# Altium PCB Magnetic Sensor.PcbDoc
Units mil, origin at the board's own origin, x right, y up, seen from the top; angles counter-clockwise.
Board outline 1405 x 1905 mil, 2 copper layers (Top Layer, Bottom Layer); 28 components, 20 nets, 98 pads, 55 vias.
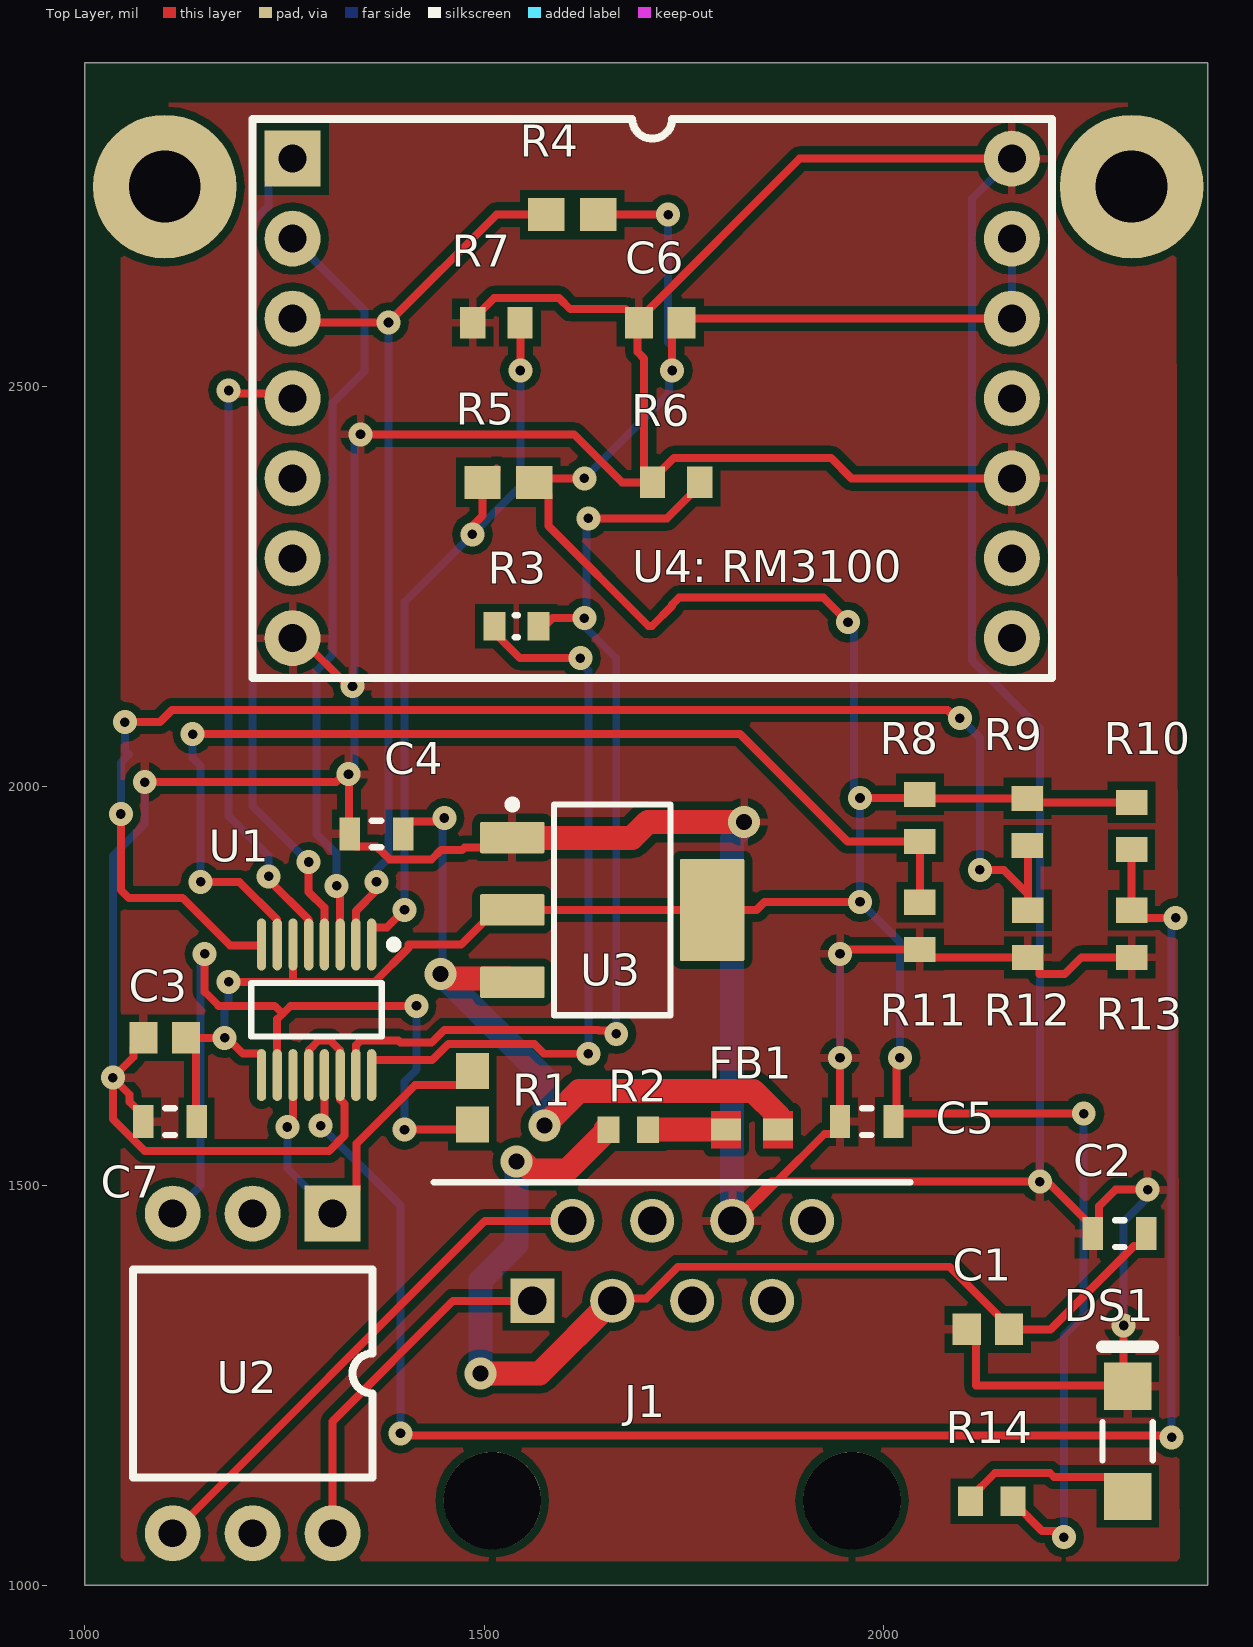
[diagram p0: Top Layer view]
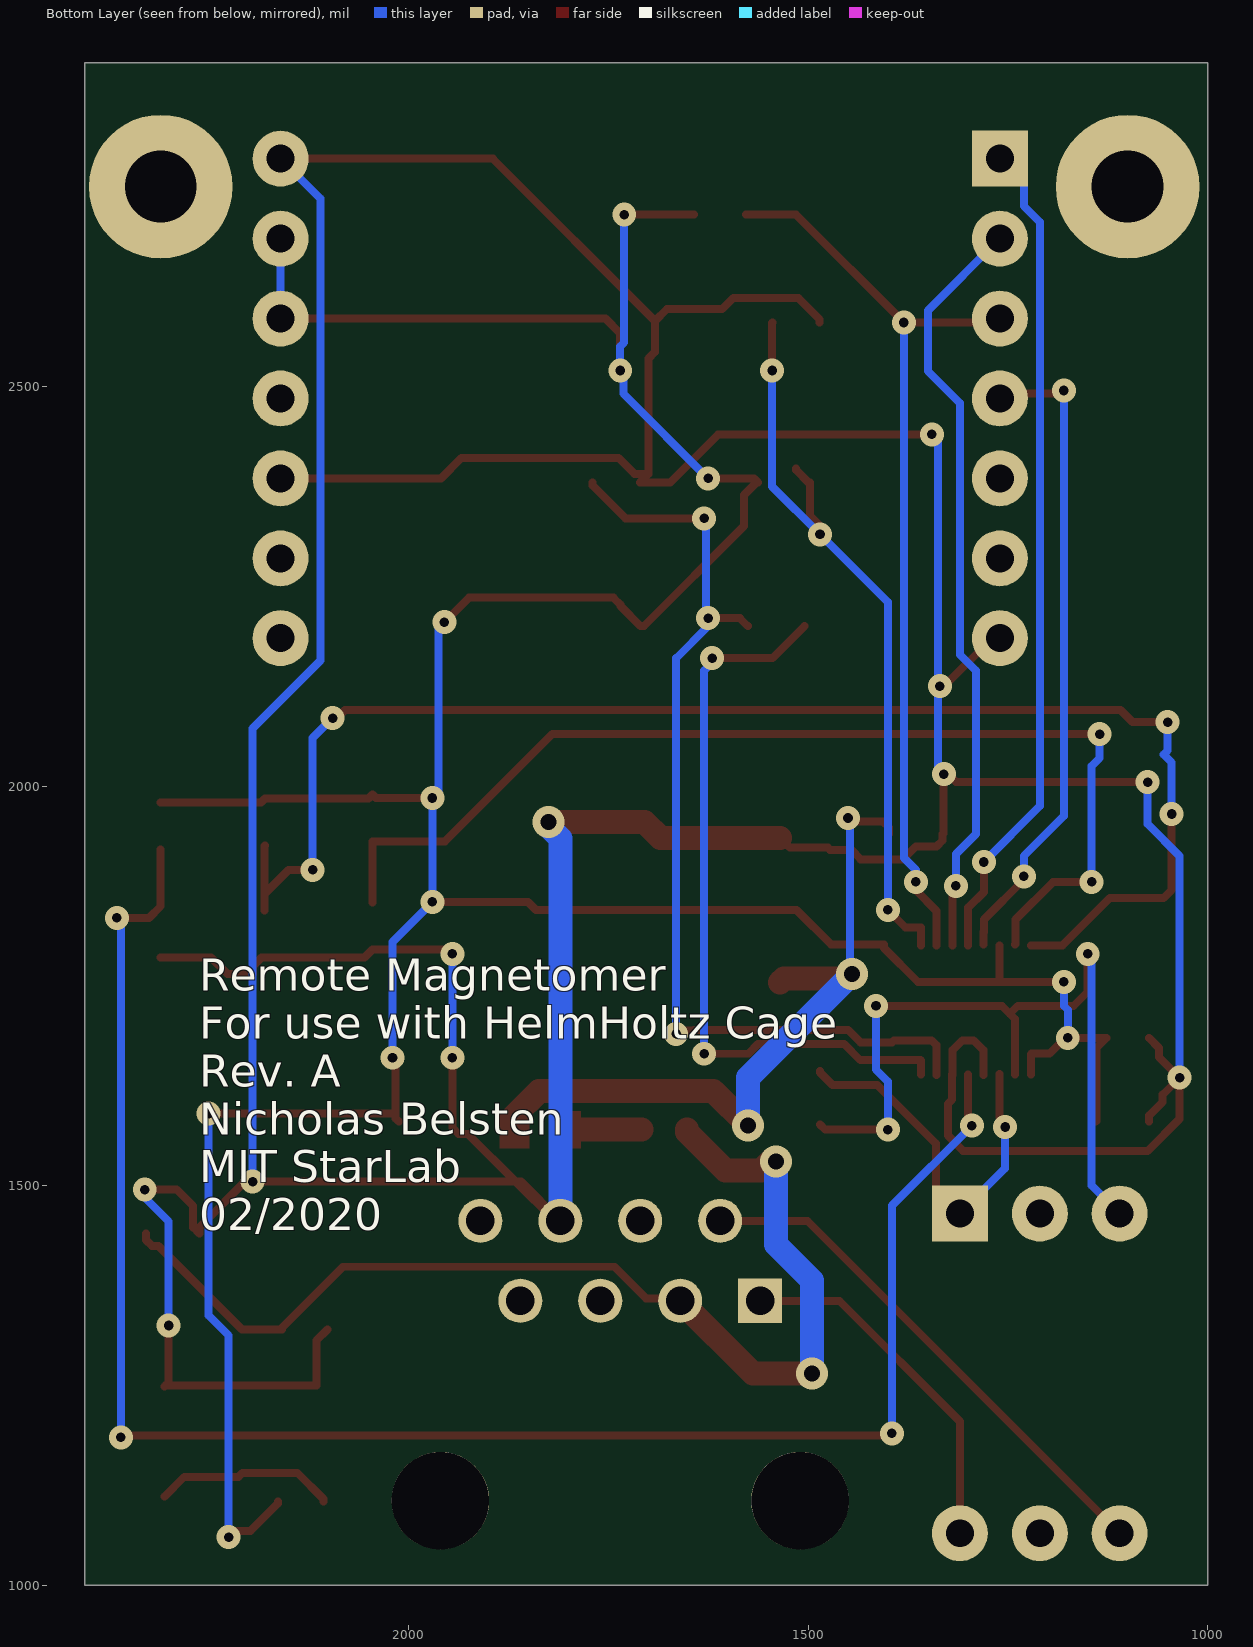
[diagram p1: Bottom Layer view, seen from below]

## Layer stack, top to bottom
Top Solder: solder mask 0.4, Solder Resist, Dk 3.5
Top Layer: signal copper 1.4
Dielectric 1: dielectric 12.6, FR-4, Dk 4.8
Bottom Layer: signal copper 1.4
Bottom Solder: solder mask 0.4, Solder Resist, Dk 3.5

## Board outline
1000,1000 2405,1000 2405,2905 1000,2905

## Design rules (kind name [scope] priority, off if disabled: settings)
Clearance [All] p1: gap=10 ignorepadtopadclearanceinfootprint=TRUE except(0: Arc-Hole Track-Hole SMDPad-Hole THPad-Hole Via-Hole Fill-Hole Poly-Hole Region-Hole Text-Hole; 6: Arc-Arc Arc-Track Arc-SMDPad Track-Track Track-SMDPad SMDPad-SMDPad SMDPad-THPad SMDPad-Via)
HoleSize [All] p1: absolutevalues=TRUE maxlimit=260 minlimit=10 maxpercent=80.000 minpercent=20.000
MinimumSolderMaskSliver [All] p1: minsoldermaskwidth=3.5
PolygonConnect [All] p1: connectstyle=Relief reliefconductorwidth=10 reliefentries=4 polygonreliefangle="90 Angle" airgapwidth=10
RoomDefinition "Magnetic Sensor" [InComponentClass('Magnetic Sensor')] p1: confinementstyle=ConfineIn formatcopy=TRUE lockcomponents=FALSE outline 925,710 2530,710 2530,2970 925,2970
RoutingVias [All] p1: holewidth=12 width=30 viastyle="Through Hole" minholewidth=10 minwidth=20 maxholewidth=28 maxwidth=50
SilkToSilkClearance [All] p1: silktosilkclearance=0
SilkToSolderMaskClearance [IsPad] p1: minsilkscreentomaskgap=3.5 clearancetoexposedcopper=TRUE
SolderMaskExpansion [All] p1: expansion=4
Width [All] p1: maxlimit=30 minlimit=6 preferedwidth=10 minimp=50.000000 maximp=50.000000 favimp=50.000000
26 further rules are at their usual default settings.

## Components (designator, comment, footprint, x,y, rotation, side; value= is the part's Value field where it differs from the comment)
C1 "0.1 uF" CAPC1608X87X35NL15T15 2130,1320 r0 top
C2 "10 uF" CAPC1608X90X20ML10 2295,1440 r0 top
C3 "0.1 uF" CAPC1608X87X35NL15T15 1100,1685 r0 top
C4 "10 uF" CAPC1608X90X20ML10 1365,1940 r0 top
C5 "10 uF" CAPC1608X90X20ML10 1978.46,1580 r0 top
C6 "0.1 uF" CAPC1608X87X35NL15T15 1720,2580 r0 top
C7 "10 uF" CAPC1608X90X20ML10 1106.54,1580 r0 top
DS1 "HSMH-C150" AVAG-HSMX-C150_V 2305,1180 r90 top
FB1 "BLM18SG221TN1D" MURA-BLM18SG-B25-CHIP-2_V1 1835,1570 r0 top
J1 "615008137121" 615008137121 1735,1150 r0 top
R1 "120" RESC1609X55X30ML15T15 1485,1610 r90 top
R2 "0.18" RESC1608X55X30LL15T15 1680,1570 r0 top
R3 "2.8 k" RESC0603(1608)_L 1540,2200 r0 top value="2800.00 Ohm"
R4 "1 k" RESC1609X55X30ML10T20 1610,2715 r0 top
R5 "1 k" RESC1609X55X30ML10T20 1530,2380 r0 top
R6 "1.2 k" RESC1608X55X25ML10T15 1740,2380 r0 top
R7 "DNP" RESC1608X55X25ML10T15 1515,2580 r0 top
R8 "DNP" RESC1608X55X25ML10T15 2045,1960 r90 top
R9 "DNP" RESC1608X55X25ML10T15 2179.53,1955 r90 top
R10 "DNP" RESC1608X55X25ML10T15 2310,1950 r90 top
R11 "0 OHM" RESC1608X55X25ML10T15 2045,1825 r90 top
R12 "0 OHM" RESC1608X55X25ML10T15 2180,1815 r90 top
R13 "0 OHM" RESC1608X55X25ML10T15 2310,1815 r90 top
R14 "150" RESC1608X55X30NL15T15 2135,1105 r0 top
U1 "LTC6820IMS#TRPBF" LT-MS-16_N 1290,1720 r270 top
U2 "78613/3C" DIP6-400 1310,1465 r270 top
U3 "REG1117-3.3/2K5" DCY0004A_M 1660,1845 r0 top
"U4: RM3100" "RM3100" DIP14-900 1260,2785 r0 top (schematic designator U4)

## Footprints (in the part's own frame and the unit in brackets; to place one, negate y for a bottom-side part, rotate by r counter-clockwise, add the part's x,y. Pads: shape width x height; smd on the part's side, far side on the other; paste and mask are expansions set on the pad)
615008137121 [mm] "Modular Jack THT Horizontal Plastic 8P8C Tab Down"
  rect 1.4x1.4 hole 0.9: 1(-4.445,5.23)
  round 1.4 hole 0.9: 2(-3.175,7.77) 3(-1.905,5.23) 4(-0.635,7.77) 5(0.635,5.23) 6(1.905,7.77) 7(3.175,5.23) 8(4.445,7.77)
  round 3.1 hole 3.1 unplated: MH1(-5.715,-1.12) MH2(5.715,-1.12)
  silkscreen extent -7.57,9 7.57,9, body extent -7.57,-9 7.57,9, height 11.75
AVAG-HSMX-C150_V [mm] "SMD, 2-Leads, Body 3.2x1.6mm"
  rect 1.5x1.5 smd: 1(-1.75,0) 2(1.75,0)
  silkscreen extent -0.6,-0.8 3,0.8, body extent -1.6,-0.8 1.6,0.8, height 1.1
CAPC1608X87X35NL15T15 [mm] "Chip Capacitor, 2-Leads, Body 1.60x0.80mm, IPC Medium Density"
  rect 0.9x1 smd: 1(-0.675,0) 2(0.675,0)
  body extent -0.87,-0.48 0.87,0.47, height 0.87
CAPC1608X90X20ML10 [mm] "Chip Capacitor, 2-Leads, Body 1.70x0.90mm, IPC Low Density"
  rect 0.65x1.05 smd: 1(-0.85,0) 2(0.85,0)
  silkscreen extent -0.15,-0.43 0.15,0.43, body extent -0.85,-0.45 0.85,0.45, height 0.9
DCY0004A_M [mm] "SOT223, 4-Leads, Body 6.7x3.7mm, Pitch 2.3mm, IPC Low Density"
  rrect10% 2.05x1 smd: 1(-3.175,2.3) 2(-3.175,0) 3(-3.175,-2.3)
  rrect5% 2.05x3.25 smd: 4(3.175,0)
  silkscreen extent -3.3,-3.35 1.85,3.47, body extent -3.5,-3.25 3.5,3.25, height 1.62
DIP6-400 [mil]
  rect 70x70 hole 35: 1(0,0)
  round 70 hole 35: 2(0,-100) 3(0,-200) 4(400,-200) 5(400,-100) 6(400,0)
  silkscreen extent 70,-250 330,50, body extent 10,-290 745,65, height 250
DIP14-900 [mil]
  rect 70x70 hole 35: 1(0,0)
  round 70 hole 35: 2(0,-100) 3(0,-200) 4(0,-300) 5(0,-400) 6(0,-500) 7(0,-600) 8(900,-600) 9(900,-500) 10(900,-400) 11(900,-300) 12(900,-200) 13(900,-100) 14(900,0)
  silkscreen extent -50,-650 950,50
LT-MS-16_N [mm] "SOP, 16-Leads, Body 4.04x3.00mm, Pitch 0.50mm, IPC Medium Density"
  oval 1.65x0.3 smd: 1(-2.075,1.75) 2(-2.075,1.25) 3(-2.075,0.75) 4(-2.075,0.25) 5(-2.075,-0.25) 6(-2.075,-0.75) 7(-2.075,-1.25) 8(-2.075,-1.75) 9(2.075,-1.75) 10(2.075,-1.25) 11(2.075,-0.75) 12(2.075,-0.25) 13(2.075,0.25) 14(2.075,0.75) 15(2.075,1.25) 16(2.075,1.75)
  silkscreen extent -2.2,-2.08 0.85,2.58, body extent -1.55,-2.05 1.55,2.05, height 1.1
MURA-BLM18SG-B25-CHIP-2_V1 [mm] "Chip Ferrite Bead, 2-Leads, Body 1.6x0.8mm, Height 0.65mm, Flow, 18um Land Pad Thickness, 1.7 to 2.5A Rated Current"
  rect 0.95x0.7 smd mask+0: 1(-0.825,0) 2(0.825,0)
  Top Layer region: -1.3,-0.6 -0.35,-0.6 -0.35,0.6 -1.3,0.6
  Top Layer region: 0.35,-0.6 1.3,-0.6 1.3,0.6 0.35,0.6
  body extent -0.8,-0.4 0.8,0.4, height 0.65
RESC0603(1608)_L [mm] "Chip Resistor, Body 1.6x0.8mm, IPC High Density"
  rect 0.7x0.9 smd: 1(-0.7,0) 2(0.7,0)
  silkscreen extent -0.05,-0.35 0.05,0.35, body extent -0.85,-0.47 0.85,0.47, height 0.6
RESC1608X55X25ML10T15 [mm] "Chip Resistor, 2-Leads, Body 1.60x0.80mm, IPC Low Density"
  rect 0.8x1 smd: 1(-0.75,0) 2(0.75,0)
  body extent -0.85,-0.45 0.85,0.45, height 0.55
RESC1608X55X30LL15T15 [mm] "Chip Resistor, 2-Leads, Body 1.60x0.80mm, IPC High Density"
  rect 0.7x0.85 smd: 1(-0.625,0) 2(0.625,0)
  body extent -0.87,-0.48 0.87,0.48, height 0.55
RESC1608X55X30NL15T15 [mm] "Chip Resistor, 2-Leads, Body 1.60x0.80mm, IPC Medium Density"
  rect 0.8x0.95 smd: 1(-0.675,0) 2(0.675,0)
  body extent -0.87,-0.48 0.87,0.48, height 0.55
RESC1609X55X30ML10T20 [mm] "Chip Resistor, 2-Leads, Body 1.60x0.85mm, IPC Low Density"
  rect 1.15x1.05 smd: 1(-0.825,0) 2(0.825,0)
  body extent -0.85,-0.48 0.85,0.48, height 0.55
RESC1609X55X30ML15T15 [mm] "Chip Resistor, 2-Leads, Body 1.75x0.95mm, IPC Low Density"
  rect 1.15x1.05 smd: 1(-0.85,0) 2(0.85,0)
  body extent -0.87,-0.48 0.87,0.48, height 0.55

## Part data
C1 C3 C6: library part CMP-2006-03300-1, Manufacturer=Kemet, Part Number=C0603X104K5RACTU
C2 C4 C5 C7: library part CMP-2000-04979-1, "Chip Capacitor, 10 uF, +/- 10%, 10 V, -55 to 85 degC, 0603 (1608 Metric), RoHS, Tape and Reel", Capacitance=10礔, Manufacturer=TDK, Operating Temperature=-55degC~85degC, Package / Case=0603(1608Metric), Package Description="2-Pin Surface Mount Device, Body 1.6 x 0.8 mm", Package Reference=603, PCN Part Number=MLCCPartNumberChange30/Nov/2012, Ratings=-, Standard Package=1, Temperature Coefficient=X5R, Tolerance=±10%, Voltage - Rated=10V, Applications=GeneralPurpose, Category=Capacitors, Datasheet URL=http://download.siliconexpert.com/pdfs/2015/4/21/15/54/45/779/tdk_/manual/37024850441143360mlcc_commercial_general_en.pdf, Datasheet Version=Mar-15, Design Resources=20WNon-IsolatedBuckLEDDriverUsingPLLNK460KG, Family=CeramicCapacitors, Features=-, Height - Seated (Max)=-, Kits=445-9003-KIT-ND-KITCAPCERHICAPMLCCSMD, Lead Spacing=-, Lead Style=-, Manufacturer URL=http://www.tdk.com/, Mounting Type=SurfaceMount,MLCC, Online Catalog=CSeries,GeneralPurpose, Other Names=445-7486-1, Packaging=CutTape(CT)牋, Product Training Modules=CSeriesGeneralApplicationsSEAT,CCV,andTVCLDesignToolsGuidetoReplacinganElectrolyticCapacitorwithanMLCC, RoHS Information=RoHSCertificate-MLCC, Series=C, Size / Dimension="0.063\"Lx0.031\"W(1.60mmx0.80mm)", Thickness (Max)="0.035\"(0.90mm)"
DS1: library part CMP-2000-06426-1, "LED Uni-Color Red, 65 mW, 25 mA, -40 to 85 degC, 2-Pin SMD, RoHS, Tape and Reel", Emitting Color=Red, Forward Current=25mA, Forward Voltage=2.6V, Manufacturer=Avago, Operating Temperature Classification=Industrial, Operating Temp Range=-40Cto85C, Package Description="2-Pin Surface Mount Device, Body 3.2 x 1.6 mm", Package Reference=HSMX-C150, Package Type=ChipLed, Power Dissipation=78W, Reverse Voltage=5V, Test Current (It)=20mA, Chip Material=GaAlAs, Datasheet URL=http://media.digikey.com/pdf/Data%20Sheets/Avago%20PDFs/HSMz-Czzz.pdf, Datasheet Version=03/2012, DELETED=Compliant, Dominant Wave Length=639nm, High Brightness=No, Lens Dimensions=2x1.6x0.6mm, Lens Type=ColorlessDiffused, Luminous Intensity=17mcd, Lum Intensity=17mcd, Main Category=ChipLED, Manufacturer URL=http://www.avagotech.com/, Mounting=SurfaceMount, Mounting Technology=SurfaceMount, Number of  Elements=1, Packaging=TapeandReel, Peak Wavelength=660nm, Pin Count=2, Product Depth (mm)=1.6mm, Product Height (mm)=1.1mm, Product Length (mm)=3.2mm, Rad Hardened=No, Shape Type=Rectangular, Type=Uni-Color, Viewing Angle=170deg
FB1: library part CMP-0686-00596-2, "Chip Ferrite Bead for Power Lines (Low DC Resistance Type), 220 Ohm, 2500 mA, -55 to 125 degC, 1.6 x 0.8 x 0.65 mm SMD, Tape and Reel", DC Resistance="0.040 Ohm Max.", Manufacturer=Murata, Operating Temperature Range="-55 to 125 degC", Rated Current="2500 mA", ComponentLink1Description="Manufacturer URL", ComponentLink1URL=http://www.murata.com/, ComponentLink2Description=Datasheet, ComponentLink2URL=http://www.murata.com/products/catalog/pdf/c31e.pdf, ComponentLink3Description="Package Specification", ComponentLink3URL=http://www.murata.com/products/catalog/pdf/c31e.pdf, DatasheetVersion=08/2013, Impedance (at 100 MHz)="220 Ohm +/- 25%", Mounting Technology="Surface Mount", PackageDescription="2-Pin Chip, Body 1.6 x 0.8 mm", PackageReference=BLM18_H650-2, Packing="Tape and Reel", PartNumber=BLM18SG221TN1D
J1: library part CMP-1502-01679-1, "Modular Jack WR-MJ, Tab Down, Plastic, Horizontal Entry, THT, 8P8C", Contact Resistance=20mOhm, Manufacturer="Wurth Elektronik", Operating Temperature=-40to85degC, Rated Current=1.5A, Withstanding Voltage=1000VAC, Working Voltage=120VAC, Compliance=Leadfree/RoHS, Datasheet URL=https://katalog.we-online.com/em/datasheet/615008137121.pdf, Entrance=Horizontal, Manufacturer URL=http://www.we-online.de, Mounting Technology=THT, Package Reference=615008137121, Packaging=Tray, Part Number=615008137121, Pin Number=8P8C, Port=1x1, Publisher=WurthElektronik
R1: library part CMP-2100-03629-1, "Chip Resistor, 120 Ohm, +/- 1%, 0.1 W, -55 to 155 degC, 0603 (1608 Metric), RoHS, Tape and Reel", Case/Package=0603, Case Code (Metric)=1608, Manufacturer=Panasonic, Max Operating Temperature=155degC, Max Power Dissipation=100mW, Min Operating Temperature=-55degC, Package Description="2-Pin Surface Mount Device, Body 1.6 x 0.85 mm", Package Quantity=1, Resistance=120Ohm, Temperature Coefficient=100ppm/degreesC, Tolerance=1%, Voltage Rating=75V, Case Code (Imperial)=0603, Composition=ThickFilm, Contact Plating=Tin, Datasheet URL=https://industrial.panasonic.com/cdbs/www-data/pdf/RDA0000/AOA0000C283.pdf, Datasheet Version=42095.0, Depth=0.8mm, Height=0.022inch, Lead Free=LeadFree, Length=1.6mm, Manufacturer URL=http://www.panasonic.com/, Military Standard=Not, Mount=SurfaceMount, Number of Pins=2, Number of Terminations=2, Package Reference=0603, Package URL=http://www.st.com/st-web-ui/static/active/en/resource/technical/document/datasheet/CD00001320.pdf, Packaging=TapeandReel, Power Rating=100mW, Radiation Hardening=No, REACH SVHC=NoSVHC, RoHSCompliant=true, Termination=SMD/SMT, Voltage Rating (DC)=75V, Width=0.031inch
R2: library part CMP-2000-00865-1, Manufacturer=Panasonic, Part Number=ERJ-3RSFR18V
R3: library part CMP-1012-00559-1, "2K8 0.1W 1% 0603 (1608 Metric)  SMD", Case-EIA=0603, Case-Metric=1608, Power="0.1 W", Tolerance="1 %", Technology=SMT
R4 R5: library part CMP-2000-02970-1, Manufacturer="Vishay Dale", Part Number=CRCW06031K00FKEAHP
R6: library part CMP-2000-04824-1, Manufacturer=Yageo, Part Number=AC0603FR-071K2L
R7 R8 R9 R10 R11 R12 R13: library part CMP-2100-03667-1, "Chip Resistor, 0 Ohm, +/- 5%, 0.1 W, -55 to 155 degC, 0603 (1608 Metric), RoHS, Tape and Reel", Case/Package=0603, Case Code (Metric)=1608, Manufacturer=Yageo, Max Operating Temperature=155degC, Min Operating Temperature=-55degC, Package Description="2-Pin Surface Mount Device, Body 1.6 x 0.8 mm", Package Quantity=5000, Power Rating=100mW, Resistance=0mOhm, Temperature Coefficient=200ppm/degreesC, Tolerance=5%, Voltage Rating=50V, Case Code (Imperial)=0603, Composition=ThickFilm, Contact Plating=Tin, Datasheet URL=http://www.yageo.com/NewPortal/yageodocoutput?fileName=/pdf/R-Chip/PYu-RC_Group_51_RoHS_L_5.pdf, Datasheet Version="Rev. 5, 10/2016", Depth=0.8mm, Height=0.45mm, Lead Free=LeadFree, Length=1.6mm, Manufacturer URL=http://www.yageo.com/, Military Standard=Not, Number of Pins=2, Package Reference=0603, Packaging=TapeandReel, Radiation Hardening=No, REACH SVHC=NoSVHC, RoHSCompliant=true, Termination=SMD/SMT, Voltage Rating (DC)=50V, Width=0.8mm
R14: library part CMP-2000-00256-1, Manufacturer=Panasonic, Part Number=ERJ-3EKF1500V
U1: library part CMP-0937-00011-1, "IsoSPI Isolated Communication Interface, 2.7 to 5.5 V, -40 to 85 degC, 16-Pin MSOP (MS), Pb-Free, Tape and Reel", IO Supply Current="1 uA Max.", IO Supply Voltage Range="1.7 to 5.5 V", Manufacturer="Linear Technology", Power Supply="2.7 to 5.5 V", Receiver Input Resistance="35 kOhm", Supply Current, IDLE State="2 uA", Temperature Range (degC)="-40 to 85", ComponentLink1Description="Manufacturer URL", ComponentLink1URL=http://www.linear.com/, ComponentLink2Description=Datasheet, ComponentLink2URL=http://cds.linear.com/docs/en/datasheet/6820fa.pdf, ComponentLink3Description="Package Specification", ComponentLink3URL=http://cds.linear.com/docs/en/packaging/05081669_A_MS16.pdf, DatasheetVersion="Rev. A", Mounting Technology="Surface Mount", PackageDescription="16-Pin Micro Small Outline Package, Body 4.039 x 3 mm, Pitch 0.5 mm", PackageReference=MS-16, PackageVersion="Rev. A", Packing="Tape and Reel", PartNumber=LTC6820IMS#TRPBF, VBIAS="1.9 to 2.1 V"
U3: library part CMP-0395-00546-2, "Single Output LDO, 800 mA, Fixed 3.3 V Output, 3.8 to 15 V Input, with Internal Current Limiting, 4-pin SOT-223 (DCY), -40 to 125 degC, Green (RoHS & no Sb/Br)", Manufacturer="Texas Instruments", Rating=Catalog, Code_JEDEC=TO-261, ComponentLink1Description="Manufacturer URL", ComponentLink1URL=http://www.ti.com/, ComponentLink2Description=Datasheet, ComponentLink2URL=http://www.ti.com/general/docs/lit/getliterature.tsp?genericPartNumber=REG1117-33&fileType=pdf, ComponentLink3Description="Package Specification", ComponentLink3URL=http://www.ti.com/litv/pdf/mpds094a, DatasheetVersion=SBVS001D, Eco-Plan="Green (RoHS & no Sb/Br)", Fixed Output Options(V)=5, Iout(Max)(A)=0.8, Iq(Typ)(mA)=4, Mounting Technology="Surface Mount", PackageDescription="4-Pin Plastic Small Outline, Body 3.5 x 6.5 mm, Pitch 2.3 mm", PackageReference=DCY0004A, PackageVersion=4202506/B, PartNumber=REG1117-3.3/2K5, SubFamily="Single Channel LDO", Vdo(Typ)(mV)=1100, Vin(Max)(V)=15, Vin(Min)(V)=3.8, Vout Adj(Max)(V)=3.3, Vout Adj(Min)(V)=3.3

## Free pads (board coordinates)
  round 180 hole 90: 1(1100,2750) 2(2310,2750)

## Via types
v1: diameter 30, hole 12, Top Layer to Bottom Layer, 50 vias
v2: diameter 40, hole 20, Top Layer to Bottom Layer, 5 vias

## Nets (pads, with @x,y where several pads share a name; then routed paths per layer and width w, separated by ;. In a path a pad name is that pad's centre, name@x,y a point inside that pad or via, vN(x,y) a via of type N, cw(c..) or ccw(c..) an arc to the next point about the centre after c; other vN are vias at no path point)
3V3: "U4: RM3100.12" "U4: RM3100.13" C3.2 C5.2 C6.2 C7.2 R4.2 R5.2 R8.2 R9.2 R10.2 R14.2 U1.6 U1.9 U3.2 U3.4 | length 4676.8
  Top Layer w10: C7.2 1139.29,1580.71 1139.29,1672.28 C3.2 v1(1175,1685) 1177.86,1685 1197.64,1665.22 1220.27,1665.22 1221.1,1664.38 U1.9@1221.1,1639.29 ; v1(1180,1755) 1260,1755 ; U1.6@1260.47,1800.71 1260.39,1800.63 1260.39,1755.39 1260,1755 ; v1(1625,2385) 1567.48,2385 R5.2 1564.45,2380 1580.12,2364.33 1580.12,2325.43 1705.55,2200 1709.49,2200 1734.84,2225.35 1734.84,2226.88 1743.63,2235.67 1924.33,2235.67 v1(1955,2205) ; R4.2 v1(1730,2715) ; v1(1735,2520) 1735,2566.46 1753.54,2585 2160,2585 ; v1(1970,1855) 1850.35,1855 1840.35,1845 U3.4 U3.2 1514.33,1845 1470.99,1801.66 1405,1801.66 1405,1797.31 1362.69,1755 1260,1755 ; v1(1970,1985) 2040.47,1985 R8.2 2050,1984.53 R9.2 2184.53,1979.53 R10.2 ; C5.2 2015.96,1584.04 C5.2@2015.96,1586.24 ; v1(2020,1660) 2015.96,1655.96 C5.2@2015.96,1586.24 ; R14.2@2163.54,1105 2163.54,1102.05 2197.94,1067.65 2217.35,1067.65 v1(2225,1060) ; v1(2250,1590) 2019.72,1590 C5.2@2015.96,1586.24
  Bottom Layer w10: v1(1175,1685) 1175,1720 1180,1725 v1(1180,1755) ; v1(1625,2385) 1731.17,2491.17 1731.17,2516.17 v1(1735,2520) 1735,2550 1730,2555 v1(1730,2715) ; v1(1955,2205) 1962.5,2197.5 1962.5,1992.5 v1(1970,1985) v1(1970,1855) 2020,1805 v1(2020,1660) ; 2160,2585 2160,2685 ; v1(2225,1060) 2225,1312.5 2250,1337.5 v1(2250,1590)
5V: C4.2 FB1.2 U3.3 | length 940.7
  Top Layer w10: C4.2 1398.46,1947.87 1406.26,1955.67 1445.67,1955.67 v1(1450,1960)
  Top Layer w30: v2(1445,1765) 1450.41,1765 1456.28,1759.13 1530.31,1759.13 U3.3 ; v2(1575,1575) 1618.62,1618.62 1836.38,1618.62 1867.48,1587.52 FB1.2
  Bottom Layer w10: v2(1445,1765) 1447.5,1767.5 1447.5,1957.5 v1(1450,1960)
  Bottom Layer w30: v2(1445,1765) 1575,1635 v2(1575,1575)
CS_L: "U4: RM3100.4" U1.5 | length 818.9
  Top Layer w10: v1(1180,2495) 1183.83,2491.17 1253.83,2491.17 1260,2485 ; v1(1230,1886.99) 1230,1882.65 1279.81,1832.84 1279.81,1817.44 1280.16,1817.09 U1.5
  Bottom Layer w10: v1(1180,2495) 1180,1962.57 1230,1912.57 v1(1230,1886.99)
GND: "U4: RM3100.7" "U4: RM3100.10" "U4: RM3100.14" C1.1 C2.1 C3.1 C4.1 C5.1 C6.1 C7.1 DS1.2 J1.6 R6.1 R7.1 R11.1 R12.1 R13.1 U1.12 U1.14 U3.1 | length 8113.1
  Top Layer w10: C7.1 1073.07,1587.87 1056.21,1604.73 1056.21,1613.79 v1(1035,1635) ; C3.1 1060.71,1672.28 1060.71,1660.71 v1(1035,1635) ; v1(1075,2005) 1314.59,2005 1324.59,2015 v1(1330,2015) 1330.77,2014.23 1330.77,1940.77 C4.1 1331.54,1932.13 1339.33,1924.33 1365.11,1924.33 1374.67,1914.77 1381.11,1908.33 1434.11,1908.33 1445.78,1920 1472.28,1920 1475.11,1922.83 1522.83,1922.83 U3.1@1535.28,1935.28 ; 1260,2185 1269.59,2185 1329.59,2125 v1(1335,2125) ; U1.12 1280.5,1638.65 1280.5,1669.45 1292.84,1681.79 1306.84,1681.79 1319.18,1669.45 1319.18,1638.65 U1.14 ; U1.14@1319.53,1639.29 1319.61,1639.21 1319.61,1607.82 1325,1602.43 1325,1562.57 1305.82,1543.39 1075,1543.39 1035,1583.39 v1(1035,1635) ; v1(1345,2440) 1612.43,2440 1672.43,2380 R6.1 R6.1@1699.72,2390.75 ; R7.1 1485.47,2583.94 1512.22,2610.69 1593.48,2610.69 1607.51,2596.65 1676.77,2596.65 C6.1@1691.46,2581.97 ; v1(1945,1660) C5.1 1945,1572.13 1937.2,1564.33 1925.35,1564.33 1866.02,1505 ; v1(1945,1790) 1950.47,1795.47 R11.1 2055,1785.47 R12.1 2183.94,1785.47 2194.69,1774.72 2194.69,1764.72 2226.22,1764.72 2246.97,1785.47 R13.1 ; C1.1@2101.46,1320 2115,1306.46 2115,1250 DS1.2@2303.9,1250 ; 2160,2385 1959.34,2385 1933.65,2410.69 1737.22,2410.69 1717.28,2390.75 R6.1@1699.72,2390.75 ; 2160,2785 1894.49,2785 C6.1@1691.46,2581.97 ; v1(2300,1325) 2300,1253.9 DS1.2@2303.9,1250 ; DS1.2 DS1.2@2303.9,1250 ; v1(2330,1495) 2290,1495 2269.33,1474.33 2269.33,1447.8 C2.1 2261.54,1447.87 2204.41,1505 v1(2195,1505) 1866.02,1505 ; C6.1@1691.46,2581.97 1691.46,2543.35 1699.72,2535.08 R6.1@1699.72,2390.75 ; 1866.02,1505 1816.92,1455.91 J1.6 1859.09,1505 1866.02,1505
  Top Layer w30: U3.1@1535.28,1935.28 1684.72,1935.28 1704.45,1955 v2(1825,1955)
  Bottom Layer w10: v1(1035,1635) 1035,1912.57 1075,1952.57 v1(1075,2005) ; v1(1330,2015) 1337.5,2022.5 1337.5,2432.5 v1(1345,2440) ; v1(1945,1660) v1(1945,1790) ; 2160,2785 2110,2735 2110,2157.09 2195,2072.09 v1(2195,1505) ; v1(2300,1325) 2300,1455 2330,1485 v1(2330,1495)
  Bottom Layer w30: J1.6 1810,1934.59 1825,1949.59 v2(1825,1955)
IM0: J1.2 U2.4 | length 661.9
  Top Layer w10: U2.4 1500.91,1455.91 J1.2
IP0: J1.1 U2.6 | length 452.5
  Top Layer w10: U2.6 1310,1205 1460.91,1355.91 J1.1
NetC1_2: C1.2 C2.2 J1.3 R2.1 | length 1399.4
  Top Layer w10: J1.3 1662.75,1358.65 1702.56,1358.65 1742.37,1398.46 2082.05,1398.46 2158.54,1321.97 2158.54,1320 2208.46,1320 2312.8,1424.33 2320.67,1424.33 2328.46,1432.13 C2.2
  Top Layer w30: v2(1495,1265) 1569.09,1265 J1.3 ; v2(1540,1530) 1547.65,1530 1558.83,1518.83 1603.24,1518.83 1651.46,1567.05 R2.1@1651.46,1570
  Bottom Layer w30: v2(1495,1265) 1495,1381.38 1540,1426.38 v2(1540,1530)
NetDS1_1: DS1.1 R14.1 | length 227.3
  Top Layer w10: R14.1@2106.46,1105 2106.46,1107.95 2139.17,1140.67 2207.52,1140.67 2212.56,1135.63 2280.47,1135.63 DS1.1
NetFB1_1: FB1.1 R2.2 | length 94
  Top Layer w30: R2.2@1708.54,1570 FB1.1
NetR1_1: R1.1 U1.10 U2.3 | length 997
  Top Layer w10: v1(1150,1790) 1150,1742.57 1167.57,1725 1237.57,1725 1247.57,1715 ; U1.10@1240.79,1639.29 1240.79,1708.21 1247.57,1715 ; v1(1400,1570) 1478.46,1570 R1.1 ; v1(1415,1725) 1257.57,1725 1247.57,1715
  Bottom Layer w10: U2.3 1145,1500 1145,1785 v1(1150,1790) ; v1(1400,1570) 1400,1630 1415,1645 v1(1415,1725)
NetR1_2: R1.2 U1.11 U2.1 | length 489.3
  Top Layer w10: v1@1256.79,1576.79 v1(1253.39,1573.39) 1253.39,1578.81 1260.47,1585.88 1260.47,1639.29 U1.11@1260.55,1639.37 ; U2.1 1340,1495 1340,1552.43 1413.4,1625.83 1469.33,1625.83 1485,1641.5 R1.2
  Bottom Layer w10: v1(1253.39,1573.39) 1253.39,1521.61 U2.1
NetR3_1: R3.1 U1.16 | length 933.2
  Top Layer w10: U1.16@1358.9,1639.29 1358.9,1656.85 1358.98,1656.93 1434.61,1656.93 1454.78,1677.1 1562.49,1677.1 1574.59,1665 v1(1630,1665) ; R3.1@1504.57,2200 1544.57,2160 v1(1620,2160)
  Bottom Layer w10: v1(1620,2160) 1620,2154.59 1630,2144.59 v1(1630,1665)
NetR3_2: R3.2 R6.2 U1.15 | length 1275.8
  Top Layer w10: U1.15 1339.56,1638.65 1339.56,1675.93 1345.42,1681.79 1392.36,1681.79 1395.15,1679 1434.05,1679 1450.05,1695 1642.43,1695 1643.6,1693.83 1661.17,1693.83 v1(1665,1690) ; U1.15@1339.21,1639.29 U1.15@1339.21,1661.77 ; R3.2@1575.43,2200 1585.43,2210 v1(1625,2210) ; v1(1630,2335) 1728.46,2335 1769.53,2376.06 R6.2
  Bottom Layer w10: v1(1630,2335) 1627.5,2332.5 1627.5,2212.5 v1(1625,2210) 1625,2200 1665,2160 v1(1665,1690)
NetR5_1: R5.1 R7.2 U1.1 | length 964.2
  Top Layer w10: U1.1@1358.9,1800.71 1358.9,1823.19 1358.98,1823.27 1378.27,1823.27 v1(1400,1845) ; v1(1485,2315) 1485,2325.82 1497.52,2338.34 R5.1 1499.49,2380 1515.16,2395.67 R5.1@1515.16,2397.64 ; R7.2 1545,2579.53 v1(1545,2520)
  Bottom Layer w10: v1(1400,1845) 1400,2230 v1(1485,2315) 1545,2375 v1(1545,2520)
SPI_MISO: "U4: RM3100.2" U1.3 | length 958.7
  Top Layer w10: v1(1315,1875) 1319.53,1870.47 U1.3@1319.53,1800.71
  Bottom Layer w10: 1260,2685 1350,2595 1350,2519.07 1310,2479.07 1310,2164.29 1290,2144.29 1290,1940 1315,1915 v1(1315,1875)
SPI_MOSI: "U4: RM3100.3" R4.1 U1.2 | length 1173.2
  Top Layer w10: 1260,2580 v1(1380,2580) 1515,2715 R4.1 ; U1.2@1339.21,1800.71 1339.21,1843.8 1365,1869.59 v1(1365,1880)
  Bottom Layer w10: 1260,2585 1262.5,2582.5 ; v1(1365,1880) 1365,1895 1380,1910 v1(1380,2580)
SPI_PHA: R9.1 R12.2 U1.8 | length 1830.3
  Top Layer w10: v1(1045,1965) 1045,1870 1055,1860 1122.43,1860 1181.72,1800.71 U1.8@1221.1,1800.71 ; v1(1050,2080) 1093.92,2080 1108.92,2095 2079.59,2095 2089.59,2085 v1(2095,2085) ; v1(2120,1895) 2150,1895 2180,1865 ; R9.1 2180,1925 2180,1865 ; R12.2 2180,1865
  Bottom Layer w10: v1(1045,1965) 1045,2029.59 1055,2039.59 1050,2044.59 v1(1050,2080) ; v1(2095,2085) 2120,2060 v1(2120,1895)
SPI_POL: R8.1 R11.2 U1.7 | length 1377.1
  Top Layer w10: v1(1135,2065) 1820,2065 1954.53,1930.47 R8.1 R11.2 ; v1(1145,1880) 1193.28,1880 1240.44,1832.84 1240.44,1802.04 U1.7
  Bottom Layer w10: v1(1135,2065) 1135,2035 1145,2025 v1(1145,1880)
SPI_SCLK: "U4: RM3100.1" U1.4 | length 1056.4
  Top Layer w10: 1260,2785 1270,2775 ; v1(1280,1905) 1280,1867.57 1299.76,1847.81 1299.76,1800.79 U1.4@1299.84,1800.71
  Bottom Layer w10: 1260,2785 1230,2755 1230,2725.71 1210,2705.71 1210,1975 v1(1280,1905)
SPI_SLOW: R10.1 R13.2 U1.13 | length 2281.9
  Top Layer w10: v1(1295,1575) 1295,1580.41 1299.84,1585.25 U1.13 ; 1299.76,1600.18 1299.76,1639.21 U1.13@1299.84,1639.29 ; v1(1395,1190) 1397.5,1187.5 2357.5,1187.5 v1(2360,1185) ; R10.1 2310,1849.69 2324.69,1835 v1(2365,1835)
  Bottom Layer w10: v1(1295,1575) 1395,1475 v1(1395,1190) ; v1(2360,1185) 2360,1830 v1(2365,1835)
pads on no net: "U4: RM3100.5" "U4: RM3100.6" "U4: RM3100.8" "U4: RM3100.9" "U4: RM3100.11" J1.4 J1.5 J1.7 J1.8 J1.MH1 J1.MH2 U2.2 U2.5

## Polygon pours and split planes (outlines as drawn)
GND on Top Layer "Top Layer-GND" (solid, pour order 0): 2370,1030 1050,1030 1045,1035 1045,2855 2365,2855

## Silkscreen, mask and mechanical layers (free items; w line width, h text height)
Bottom Overlay:
  text "Remote Magnetomer / For use with HelmHoltz Cage / Rev. A / Nicholas Belsten / MIT StarLab / 02/2020" at 2261.54,1443.94 h40
Mechanical 3:
  the board outline again, w10

## Text inside footprints (layer, text, board x,y; h text height)
FB1: Mechanical 6 "Land Pattern Adapted for Flow Soldering and 18um Land Pad Thickness" at 1770.04,1601.5 h1.97